# Altium PCB Arduino_FPGA_Shield.PcbDoc (part 1 of 2)
Units mm, origin at the board's own origin, x right, y up, seen from the top; angles counter-clockwise.
Board outline 68.58 x 53.34 mm, 4 copper layers (Top, PWR, GND, Bottom), stack 2.023 mm thick; 82 components, 141 nets, 474 pads, 191 vias.
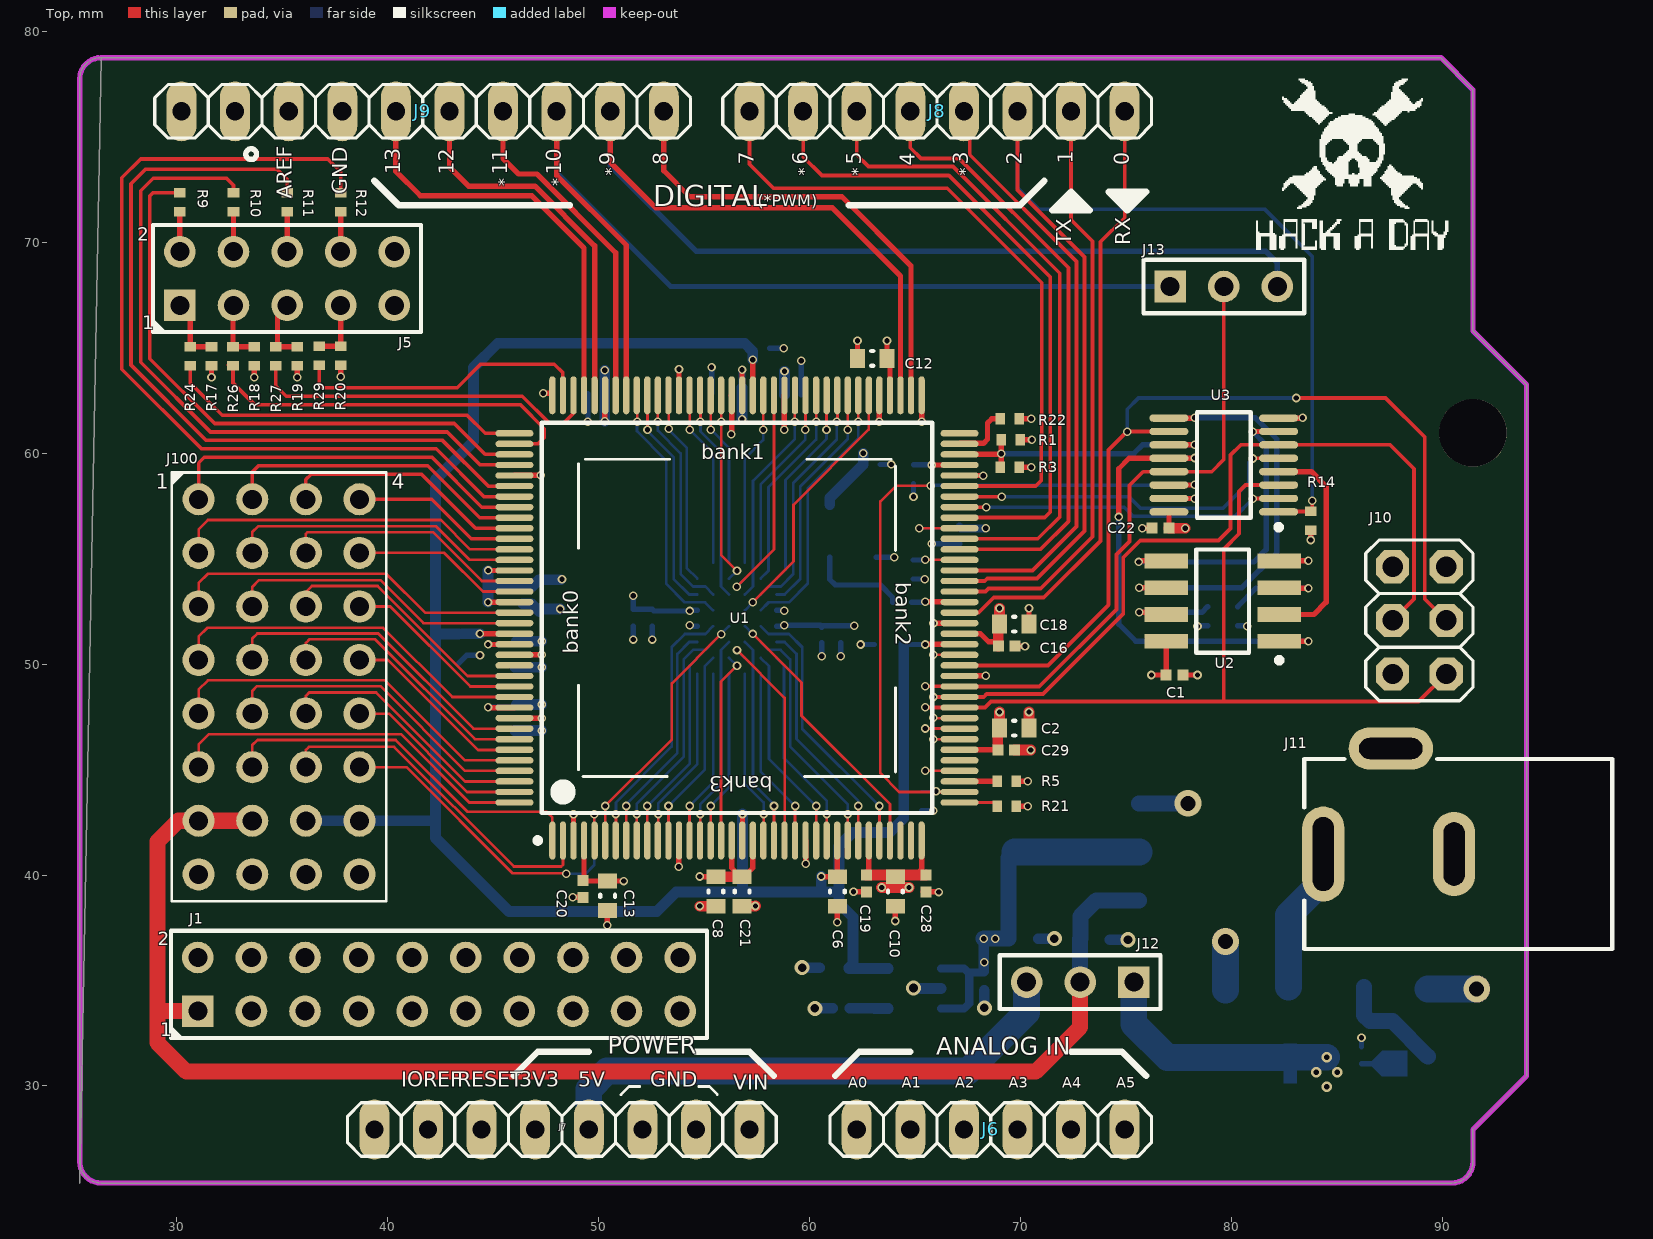
[diagram p0: Top view]
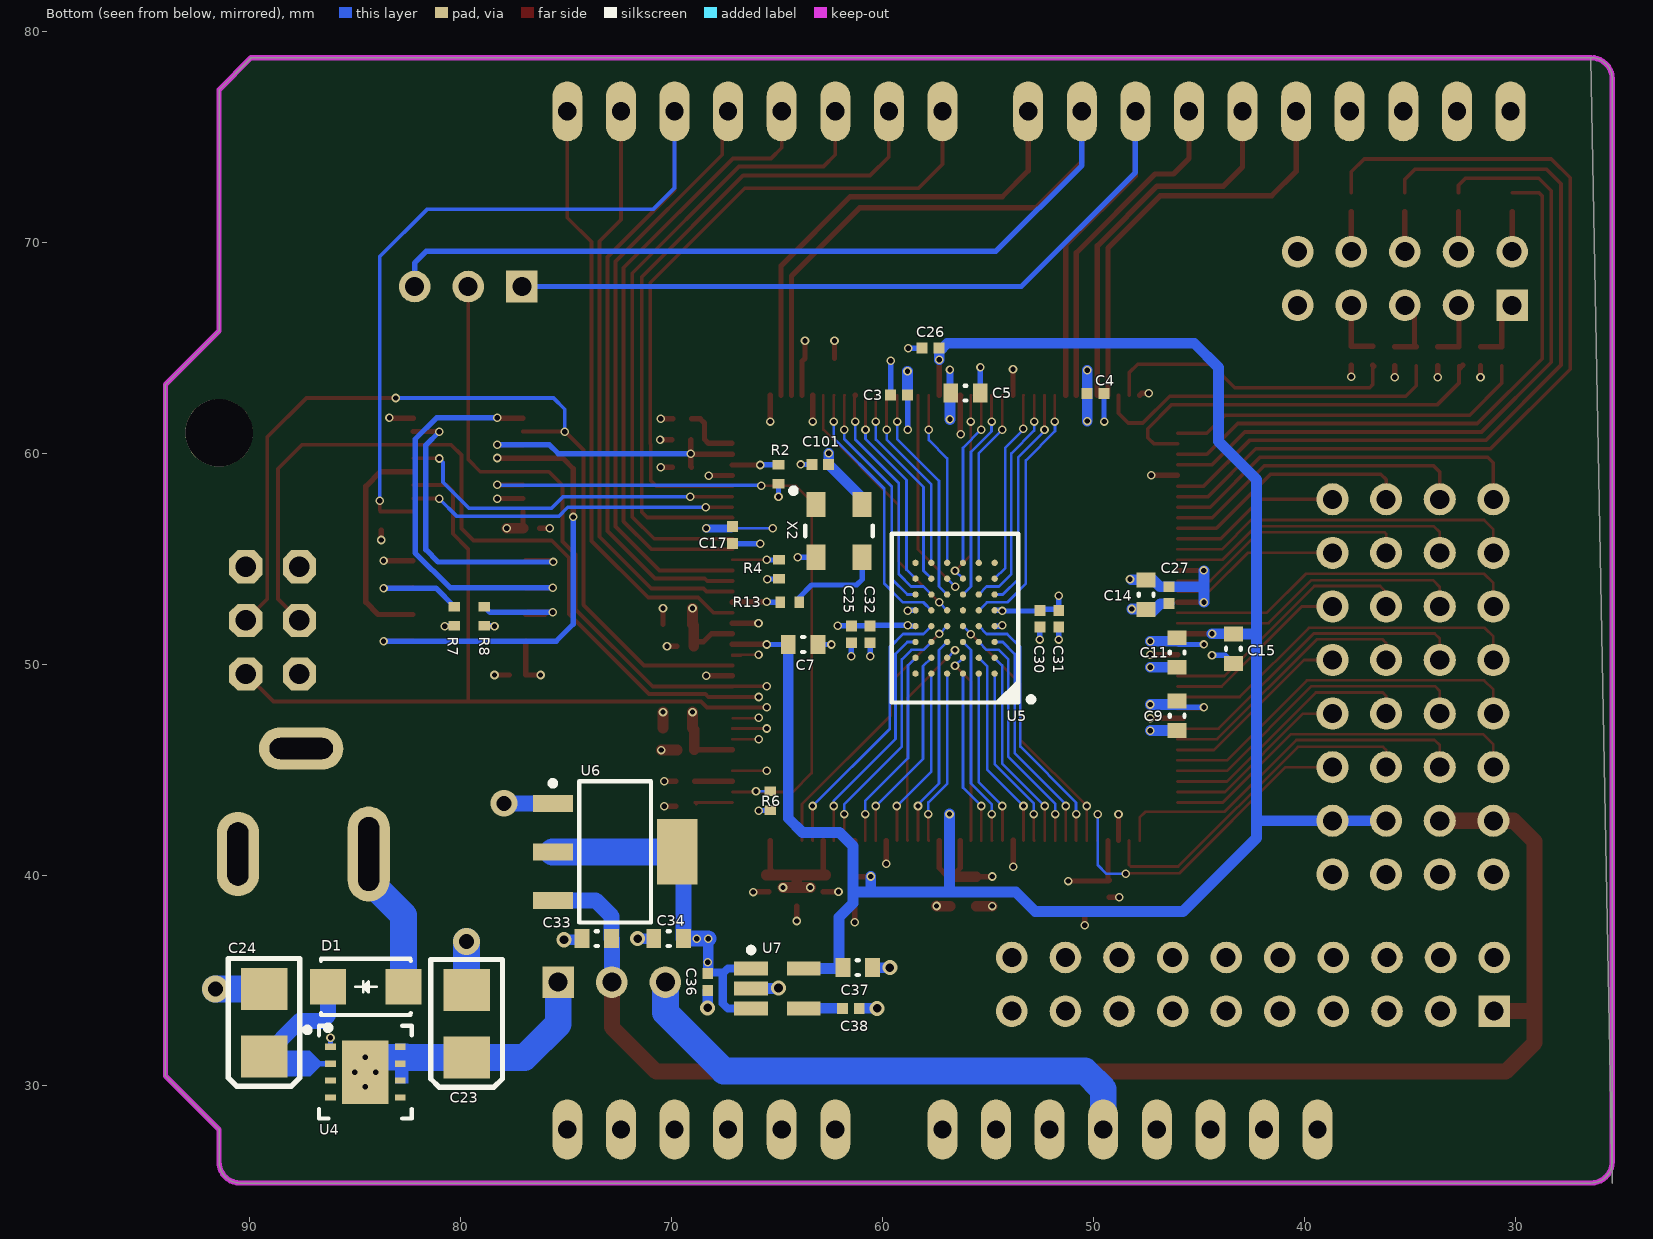
[diagram p1: Bottom view, seen from below]
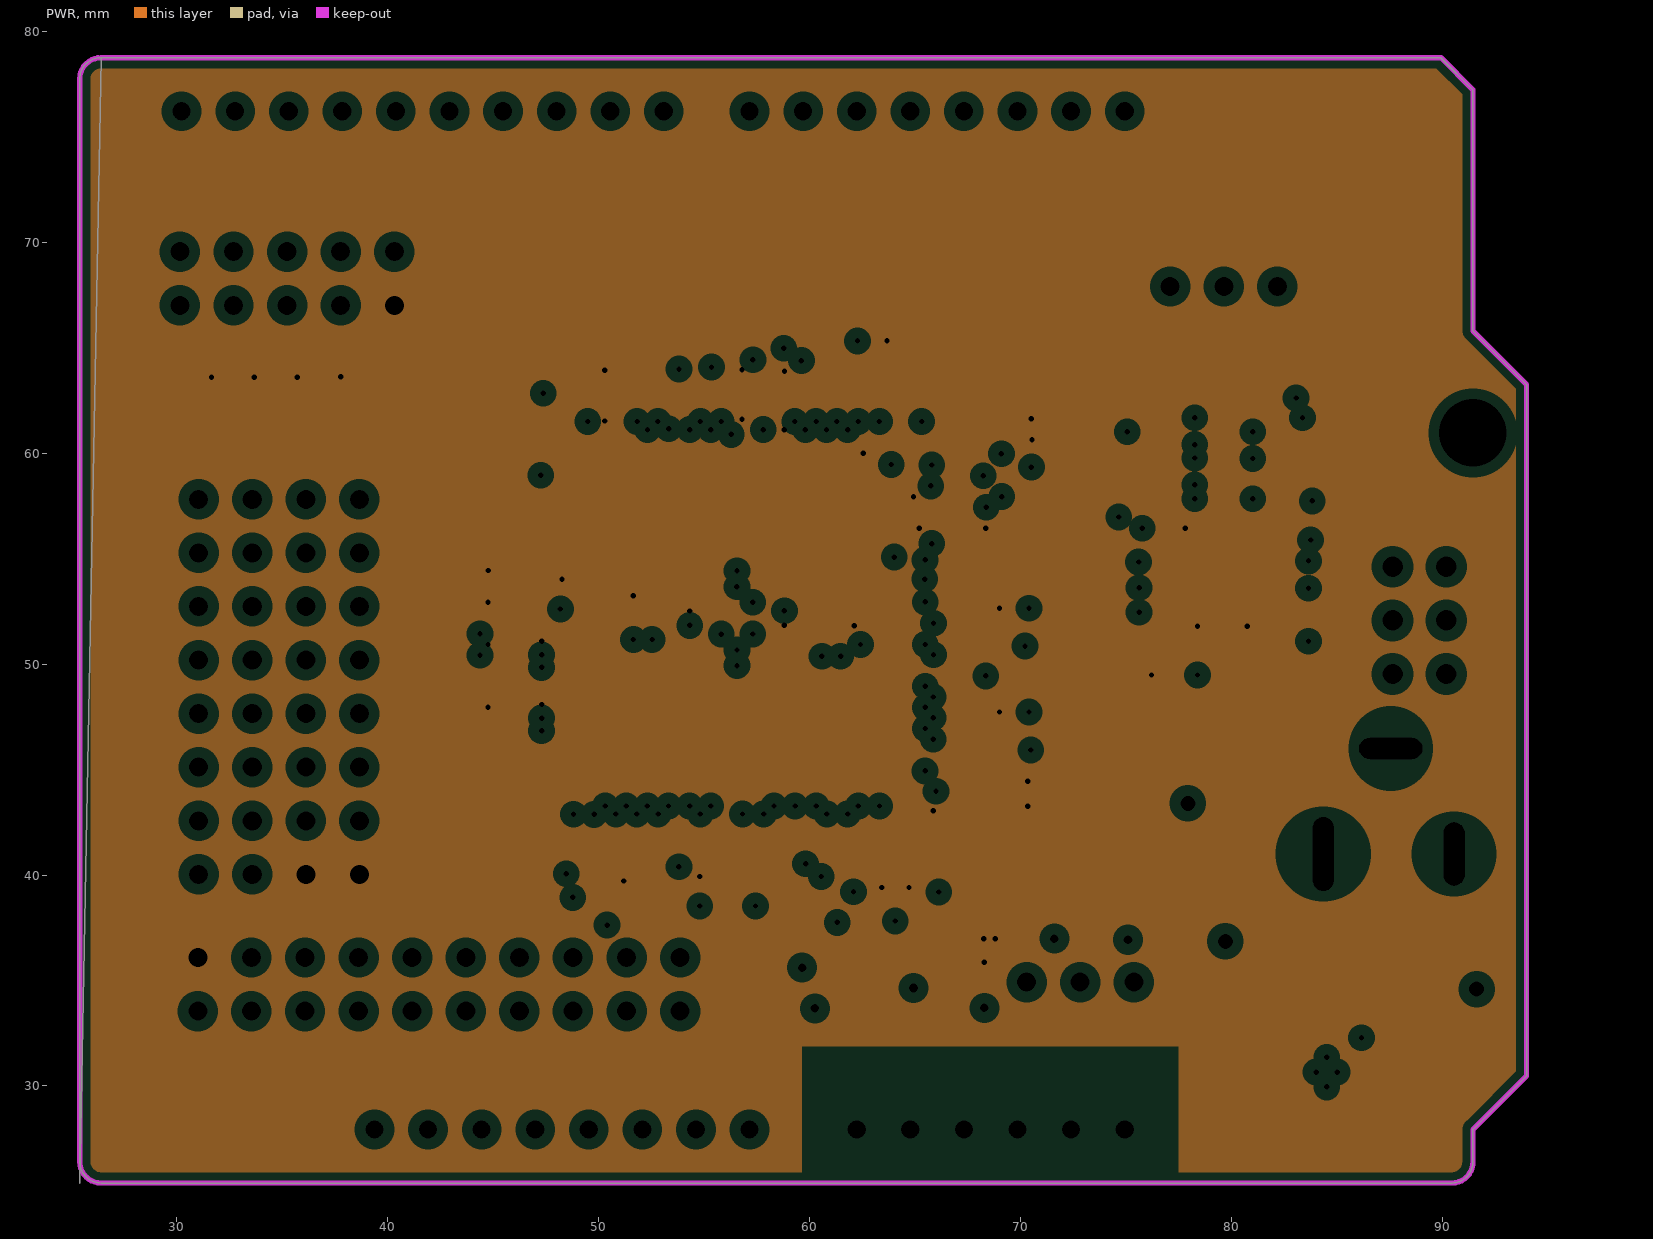
[diagram p2: PWR, clearances drawn from the general rule]
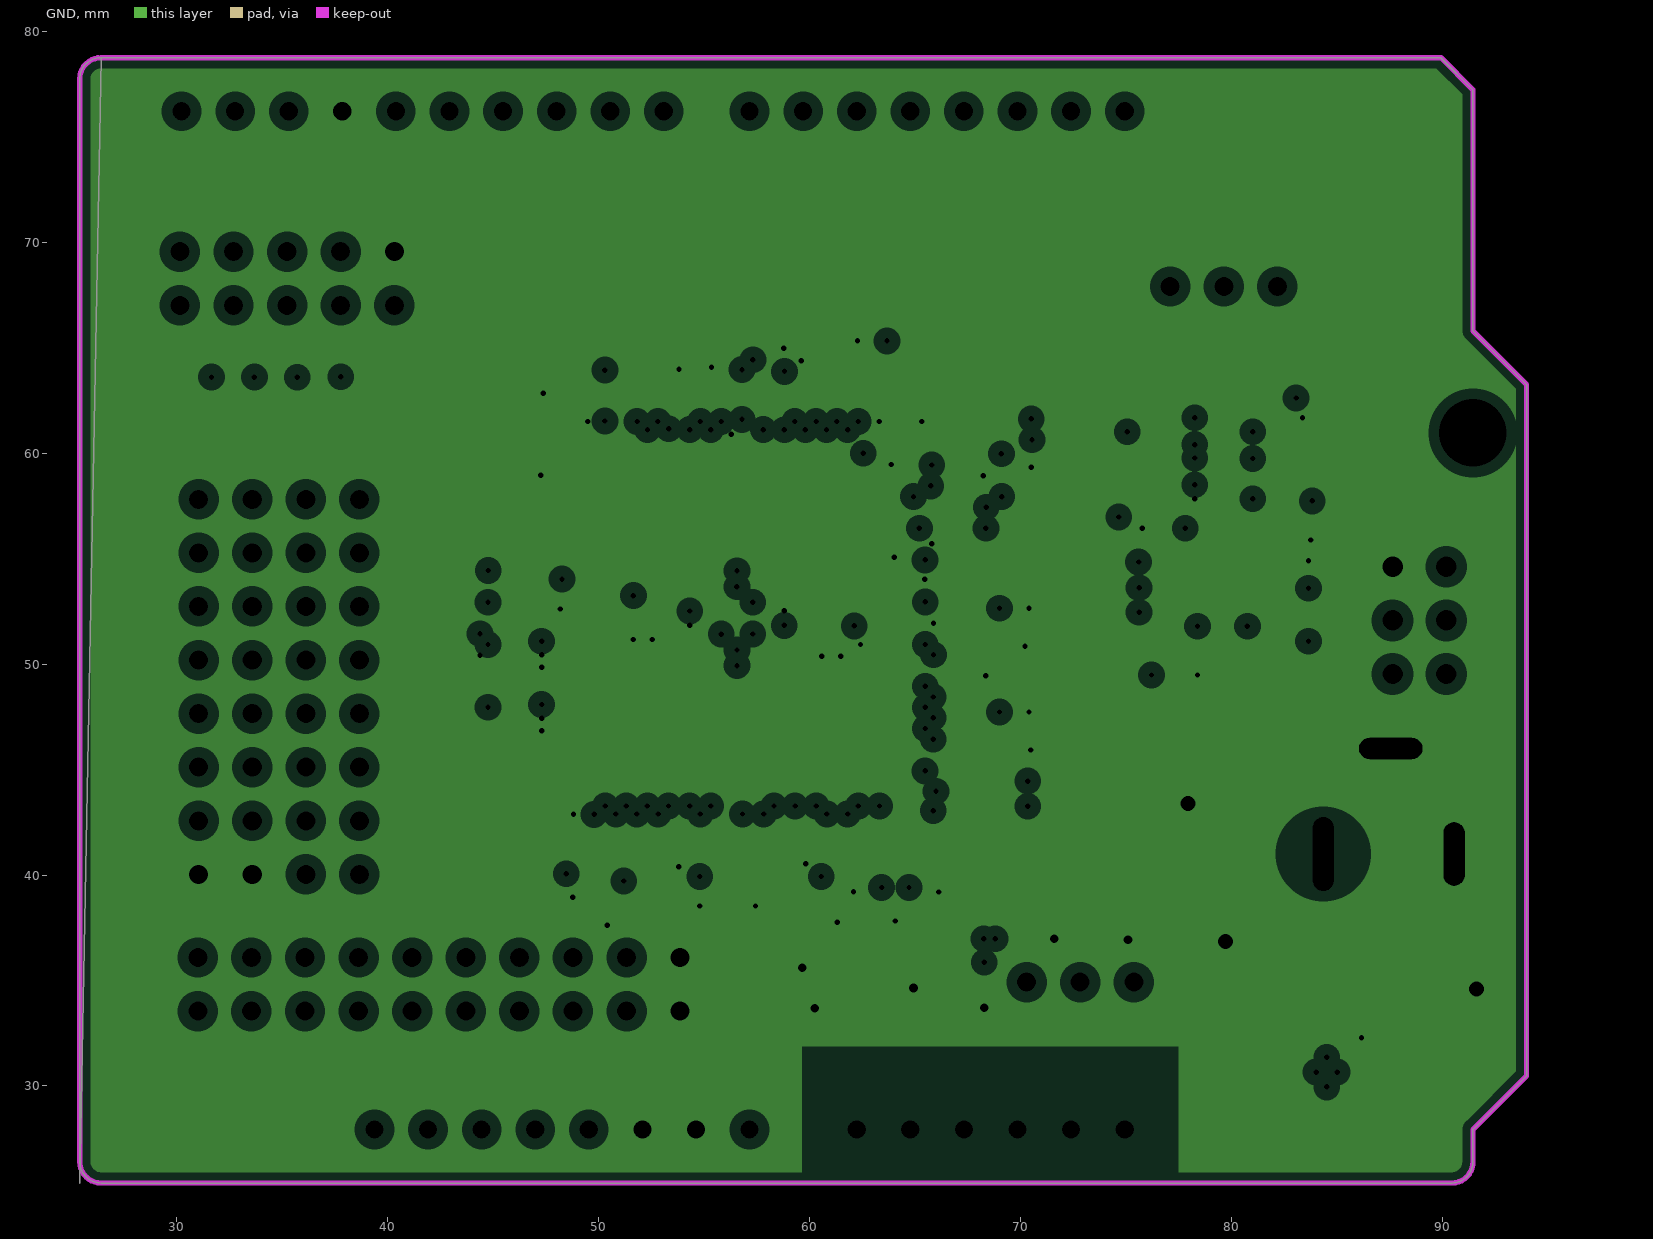
[diagram p3: GND, clearances drawn from the general rule]

## Layer stack, top to bottom
Top Solder: solder mask 0.0102, Solder Resist, Dk 3.5
Top: signal copper 0.035
Dielectric 1: core 1.5, FR-4, Dk 4.8
PWR: plane copper 0.036, net 3V3
Dielectric 4: prepreg 0.127, Dk 4.2
GND: plane copper 0.036, net GND
Dielectric 2: core 0.254, Dk 4.2
Bottom: signal copper 0.035
Bottom Solder: solder mask 0.0102, Solder Resist, Dk 3.5

## Board outline
26.416,78.74 89.916,78.74 91.44,77.216 91.44,65.786 93.98,63.246 93.98,30.48 91.44,27.94 91.44,26.416 cw(c90.437,26.403) 90.449,25.4 26.416,25.4 cw(c26.416,26.416) 25.4,26.416 25.4,77.749 cw(c26.403,77.737) 25.4,25.4

## Design rules (kind name [scope] priority, off if disabled: settings)
Clearance [All] p1: gap=0.137
HoleSize [All] p1: absolutevalues=TRUE maxlimit=2540 minlimit=0.178 maxpercent=80.000 minpercent=20.000
HoleToHoleClearance [All] p1: gap=0.203 allowstackedmicrovias=TRUE
MinimumSolderMaskSliver [All] p1 off: minsoldermaskwidth=0.254
PasteMaskExpansion [All] p1: expansion=0.051
PlaneClearance [All] p1: clearance=0.508
PlaneConnect PlaneConnect_1 [IsVia And (AsMM(ViaDiameter) = 0.405)] p1: planeconnectstyle=NoConnect reliefexpansion=0.508 reliefentries=4 reliefconductorwidth=0.254 reliefairgap=0.254
PlaneConnect [All] p2: planeconnectstyle=Relief reliefexpansion=0.508 reliefentries=4 reliefconductorwidth=0.254 reliefairgap=0.254
PolygonConnect ThermalVias [IsVia] p1: connectstyle=Direct reliefconductorwidth=0.254 reliefentries=4 polygonreliefangle="90 Angle" airgapwidth=0.254
PolygonConnect [All] p2: connectstyle=Relief reliefconductorwidth=0.254 reliefentries=4 polygonreliefangle="90 Angle" airgapwidth=0.254
RoutingVias [All] p1: holewidth=0.254 width=0.406 viastyle="Through Hole" minholewidth=0.254 minwidth=0.406 maxholewidth=0.711 maxwidth=1.219
SilkToBoardRegionClearance [All] p1 off:
SilkToSilkClearance [All] p1 off: silktosilkclearance=0.254
SilkToSolderMaskClearance [IsPad] p1 off: minsilkscreentomaskgap=0.254 clearancetoexposedcopper=TRUE
SolderMaskExpansion [All] p1: expansion=0.025
Width POWER [InNetClass('POWER')] p1: maxlimit=2.54 minlimit=0.254 preferedwidth=0.254
Width [All] p2: maxlimit=2.54 minlimit=0.127 preferedwidth=0.127
20 further rules are at their usual default settings.

## Classes and differential pairs
component class "Power - 3V3": C33 C34 U6
net class SRAM0_D[15..0]: SRAM0_D0 SRAM0_D1 SRAM0_D2 SRAM0_D3 SRAM0_D4 SRAM0_D5 SRAM0_D6 SRAM0_D7 SRAM0_D8 SRAM0_D9 SRAM0_D10 SRAM0_D11 SRAM0_D12 SRAM0_D13 SRAM0_D14 SRAM0_D15
net class SRAM0_A[17..0]: SRAM0_A0 SRAM0_A1 SRAM0_A2 SRAM0_A3 SRAM0_A4 SRAM0_A5 SRAM0_A6 SRAM0_A7 SRAM0_A8 SRAM0_A9 SRAM0_A10 SRAM0_A11 SRAM0_A12 SRAM0_A13 SRAM0_A14 SRAM0_A15 SRAM0_A16 SRAM0_A17
component class SRAM0: C25 C30 C31 C32 U5
component class "SPI MUX": C22 U3
component class FLASH_MEMORY: C1 R7 R8 U2
component class POWER: C23 C24 D1 J11 J12 U4
component class "Arduino FPGA Top-Level Interface": J1 J5 J6 J7 J8 J9 J10 J13 J100
component class "U_FPGA - Decoupling": C2 C3 C4 C5 C6 C7 C8 C9 C10 C11 C12 C13 C14 C15 C16 C17 C18 C19 C20 C21 C26 C27 C28 C29
component class FPGA_SUBSYSTEM: R1 R2 R3 R4 R5 R6 R9 R10 R11 R12 R17 R18 R19 R20 R21 R22 R24 R26 R27 R29 U1
component class "ARDUINO FPGA DESIGN": C101 R13 R14 X2
component class "Power - 1V2": C36 C37 C38 U7

## Components (designator, comment, footprint, x,y, rotation, side; value= is the part's Value field where it differs from the comment)
C1 "CAP 100nF 16V 0402(1005)" CAPC0402(1005)60_L 77.292,49.479 r0 top
C2 "CAP 4.7uF 10V 0603(1608)" CAPC0603(1608)55_L 69.698,46.965 r0 top
C3 "CAP 470nF 10V 0402(1005)" CAPC0402(1005)60_L 59.207,62.763 r180 bottom
C4 "CAP 470nF 10V 0402(1005)" CAPC0402(1005)60_L 49.892,62.823 r0 bottom
C5 "CAP 4.7uF 10V 0603(1608)" CAPC0603(1608)55_L 56.058,62.84 r180 bottom
C6 "CAP 4.7uF 10V 0603(1608)" CAPC0603(1608)55_L 61.316,39.218 r270 top
C7 "CAP 4.7uF 10V 0603(1608)" CAPC0603(1608)55_L 63.754,50.927 r180 bottom
C8 "CAP 4.7uF 10V 0603(1608)" CAPC0603(1608)55_L 55.55,39.218 r270 top
C9 "CAP 4.7uF 10V 0603(1608)" CAPC0603(1608)55_L 46.025,47.549 r270 bottom
C10 "CAP 4.7uF 10V 0603(1608)" CAPC0603(1608)55_L 64.059,39.218 r270 top
C11 "CAP 4.7uF 10V 0603(1608)" CAPC0603(1608)55_L 46.025,50.546 r270 bottom
C12 "CAP 4.7uF 10V 0603(1608)" CAPC0603(1608)55_L 62.967,64.491 r180 top
C13 "CAP 4.7uF 10V 0603(1608)" CAPC0603(1608)55_L 50.419,39.014 r270 top
C14 "CAP 4.7uF 10V 0603(1608)" CAPC0603(1608)55_L 47.498,53.289 r90 bottom
C15 "CAP 4.7uF 10V 0603(1608)" CAPC0603(1608)55_L 43.358,50.724 r270 bottom
C16 "CAP 470nF 10V 0402(1005)" CAPC0402(1005)60_L 69.342,50.851 r180 top
C17 "CAP 470nF 10V 0402(1005)" CAPC0402(1005)60_L 67.107,56.109 r90 bottom
C18 "CAP 4.7uF 10V 0603(1608)" CAPC0603(1608)55_L 69.698,51.892 r180 top
C19 "CAP 470nF 10V 0402(1005)" CAPC0402(1005)60_L 62.687,39.599 r90 top
C20 "CAP 470nF 10V 0402(1005)" CAPC0402(1005)60_L 49.251,39.345 r90 top
C21 "CAP 4.7uF 10V 0603(1608)" CAPC0603(1608)55_L 56.794,39.218 r90 top
C22 "CAP 100nF 16V 0402(1005)" CAPC0402(1005)60_L 76.632,56.439 r180 top
C23 "TAJB106K020R" AVX-CAPC3528_V 79.705,32.944 r90 bottom
C24 "TAJB106K020R" AVX-CAPC3528_V 89.306,32.995 r90 bottom
C25 "CAP 100nF 16V 0402(1005)" CAPC0402(1005)60_L 61.468,51.41 r270 bottom
C26 "CAP 470nF 10V 0402(1005)" CAPC0402(1005)60_L 57.709,64.973 r0 bottom
C27 "CAP 470nF 10V 0402(1005)" CAPC0402(1005)60_L 46.406,53.264 r270 bottom
C28 "CAP 470nF 10V 0402(1005)" CAPC0402(1005)60_L 65.507,39.599 r90 top
C29 "CAP 470nF 10V 0402(1005)" CAPC0402(1005)60_L 69.317,45.923 r180 top
C30 "CAP 100nF 16V 0402(1005)" CAPC0402(1005)60_L 52.527,52.146 r270 bottom
C31 "CAP 10nF 16V 0402(1005)" CAPC0402(1005)33_L 51.638,52.146 r270 bottom
C32 "CAP 10nF 16V 0402(1005)" CAPC0402(1005)33_L 60.579,51.41 r270 bottom
C33 "CAP 4.7uF 10V 0603(1608)" CAPC0603(1608)55_L 73.533,36.982 r0 bottom
C34 "CAP 4.7uF 10V 0603(1608)" CAPC0603(1608)55_L 70.129,36.982 r0 bottom
C36 "CAP 1uF 16V 0402(1005)" CAPC0402(1005)60_L 68.275,34.925 r90 bottom
C37 "CAP 2.2uF 16V 0603(1608)" CAPC0603(1608)55_L 61.163,35.611 r0 bottom
C38 "CAP 10nF 16V 0402(1005)" CAPC0402(1005)33_L 61.493,33.68 r0 bottom
C101 "CAP 100nF 16V 0402(1005)" CAPC0402(1005)60_L 62.941,59.461 r0 bottom
D1 "S1G" DO-214AC 84.48,34.696 r0 bottom
J1 "Header 10X2" HEADER_10X2 31,33.5 r0 top
J5 "Header 5X2" HDR2X5 30.15,67.005 r0 top
J6 "Header 6" 1X06 68.58,27.94 r0 top
J7 "Header 8" 1X08 48.26,27.94 r0 top
J8 "Header 8" 1X08 66.04,76.2 r180 top
J9 "Header 10" 1X10@1 41.656,76.2 r180 top
J10 "Header 3X2" 2X03 88.9,52.07 r90 top
J11 "PWR CONNECTOR" KLD-0202 98.044,40.996 r180 top
J12 "3-WAY JUMPER" HDR1X3 75.362,34.925 r180 top
J13 "3-WAY JUMPER" HDR1X3 77.089,67.894 r0 top
J100 "ARR_32P" ARR_100X100X32P 31.039,57.81 r0 top
R1 "100R 1 0402" RESC0402(1005)40_L 69.52,60.63 r0 top
R2 "4K7 1 0402" RESC0402(1005)40_L 64.922,59.004 r270 bottom
R3 "100R 1 0402" RESC0402(1005)40_L 69.494,59.334 r180 top
R4 "1K 1 0402" RESC0402(1005)40_L 64.897,54.483 r90 bottom
R5 "4K7 1 0402" RESC0402(1005)40_L 69.342,44.45 r0 top
R6 "4K7 1 0402" RESC0402(1005)40_L 65.303,43.51 r270 bottom
R7 "4K7" RESC0402(1005)40_L 80.289,52.273 r270 bottom
R8 "4K7" RESC0402(1005)40_L 78.867,52.273 r270 bottom
R9 "33R 1 0402" RESC0402(1005)40_L 30.15,71.882 r90 top
R10 "33R 1 0402" RESC0402(1005)40_L 32.69,71.882 r90 top
R11 "33R 1 0402" RESC0402(1005)40_L 35.23,71.882 r90 top
R12 "33R 1 0402" RESC0402(1005)40_L 37.77,71.882 r90 top
R13 "33R 1 0402" RESC0402(1005)40_L 64.389,52.934 r180 bottom
R14 "4K7 1 0402" RESC0402(1005)40_L 83.744,56.794 r90 top
R17 "4K7 1 0402" RESC0402(1005)40_L 31.648,64.592 r270 top
R18 "4K7 1 0402" RESC0402(1005)40_L 33.68,64.592 r270 top
R19 "4K7 1 0402" RESC0402(1005)40_L 35.712,64.585 r270 top
R20 "4K7 1 0402" RESC0402(1005)40_L 37.77,64.61 r270 top
R21 "4K7 1 0402" RESC0402(1005)40_L 69.342,43.256 r0 top
R22 "330R 1 0402" RESC0402(1005)40_L 69.487,61.62 r0 top
R24 "33R 1 0402" RESC0402(1005)40_L 30.632,64.592 r270 top
R26 "33R 1 0402" RESC0402(1005)40_L 32.664,64.592 r270 top
R27 "33R 1 0402" RESC0402(1005)40_L 34.696,64.585 r270 top
R29 "33R 1 0402" RESC0402(1005)40_L 36.754,64.61 r270 top
U1 "XC6SLX9-2TQG144C" TQG144_N 56.555,52.187 r90 top
U2 "S25FL216K0PMFI041" SPANSION-SOIC127P600X175-8M 79.578,52.984 r180 top
U3 "SN74CBTLV3257DBQR" TI-DBQ16_N 79.629,59.436 r180 top
U4 "LM1086ILD-3.3/NOPB" LDC08A 84.506,30.658 r180 bottom
U5 "IS61WV12816DBLL-10BLI" ISSI-TF-BGA-48-6000X8000DE 56.552,52.172 r0 bottom
U6 "AP2114H-3.3TRG1" SOT230P700X180-4L 72.669,41.097 r180 bottom
U7 "CAT6219-125TDGT3" ONSC-SOT23-5_M 64.973,34.62 r180 bottom
X2 "KC5032A20.0000CM0E00" HOSC-L500HW320H105-4_2 62.052,56.312 r270 bottom

## Footprints (in the part's own frame and the unit in brackets; to place one, negate y for a bottom-side part, rotate by r counter-clockwise, add the part's x,y. Pads: shape width x height; smd on the part's side, far side on the other; paste and mask are expansions set on the pad)
1X06 [mil] "1X06"
  oval 56x112 hole 34: 1(-250,0) 2(-150,0) 3(-50,0) 4(50,0) 5(150,0) 6(250,0)
  silkscreen extent -300,-50 300,50
1X08 [mil] "1X08"
  oval 56x112 hole 34: 1(-350,0) 2(-250,0) 3(-150,0) 4(-50,0) 5(50,0) 6(150,0) 7(250,0) 8(350,0)
  silkscreen extent -400,-50 400,50
1X10@1 [mil] "1X10@1"
  oval 56x112 hole 34: 1(-450,0) 2(-350,0) 3(-250,0) 4(-150,0) 5(-50,0) 6(50,0) 7(150,0) 8(250,0) 9(350,0) 10(450,0)
  silkscreen extent -500,-50 500,50
2X03 [mil] "2X03"
  oct 62x62 hole 38: 1(-100,-50) 2(-100,50) 3(0,-50) 4(0,50) 5(100,-50) 6(100,50)
  silkscreen extent -150,-100 150,100
ARR_100X100X32P [mil] "100X100mil 32 PIN ARRAY OF PADS"
  round 60 hole 35.5: 1(0,0) 2(100,0) 3(200,0) 4(300,0) 5(0,-100) 6(100,-100) 7(200,-100) 8(300,-100) 9(0,-200) 10(100,-200) 11(200,-200) 12(300,-200) 13(0,-300) 14(100,-300) 15(200,-300) 16(300,-300) 17(0,-400) 18(100,-400) 19(200,-400) 20(300,-400) 21(0,-500) 22(100,-500) 23(200,-500) 24(300,-500) 25(0,-600) 26(100,-600) 27(200,-600) 28(300,-600) 29(0,-700) 30(100,-700) 31(200,-700) 32(300,-700)
  silkscreen extent -50,-750 350,50
AVX-CAPC3528_V [mm] "SMT Capacitor, 2 Leads, Body 3.5x2.8mm"
  rect 2x2.2 smd: 1(-1.6,0) 2(1.6,0)
  silkscreen extent -3,-1.7 3.05,1.7, body extent -1.79,-1.54 1.8,1.54, height 1.9
CAPC0402(1005)33_L [mm] "Chip Capacitor, Body 1.0x0.5mm, Height 0.33mm, IPC High Density"
  rect 0.52x0.52 smd: 1(-0.4,0) 2(0.4,0)
  body extent -0.55,-0.3 0.55,0.3, height 0.33
CAPC0402(1005)60_L [mm] "Chip Capacitor, Body 1.0x0.5mm, Height 0.6mm, IPC High Density"
  rect 0.52x0.52 smd: 1(-0.4,0) 2(0.4,0)
  body extent -0.55,-0.3 0.55,0.3, height 0.6
CAPC0603(1608)55_L [mm] "Chip Capacitor, Body 1.6x0.8mm, Height 0.55mm, IPC High Density"
  rect 0.7x0.9 smd: 1(-0.7,0) 2(0.7,0)
  silkscreen extent -0.05,-0.35 0.05,0.35, body extent -0.87,-0.47 0.88,0.48, height 0.55
DO-214AC [mm] "SMA, 2-Leads, Body 4.245x2.665mm, Height 2.29mm"
  rect 1.7x1.68 smd: 1(-1.79,0) 2(1.79,0)
  silkscreen extent -2.12,-1.33 2.12,2.06, body extent -2.57,-1.33 2.57,1.33, height 2.29
HDR1X3 [mm] "Connector; Header; 3 Position"
  rect 1.5x1.5 hole 0.9: 1(0,0)
  round 1.5 hole 0.9: 2(2.54,0) 3(5.08,0)
  silkscreen extent -1.27,-1.27 6.35,1.27
HDR2X5 [mm] "Connector; Header; 5x2 Position"
  rect 1.5x1.5 hole 0.9: 1(0,0)
  round 1.5 hole 0.9: 2(0,2.54) 3(2.54,0) 4(2.54,2.54) 5(5.08,0) 6(5.08,2.54) 7(7.62,0) 8(7.62,2.54) 9(10.16,0) 10(10.16,2.54)
  silkscreen extent -1.27,-1.27 11.43,3.81
HEADER_10X2 [mm]
  rect 1.5x1.5 hole 0.9: 1(0,0.051)
  round 1.5 hole 0.9: 2(0,2.591) 3(2.54,0.051) 4(2.54,2.591) 5(5.08,0.051) 6(5.08,2.591) 7(7.62,0.051) 8(7.62,2.591) 9(10.16,0.051) 10(10.16,2.591) 11(12.7,0.051) 12(12.7,2.591) 13(15.24,0.051) 14(15.24,2.591) 15(17.78,0.051) 16(17.78,2.591) 17(20.32,0.051) 18(20.32,2.591) 19(22.86,0.051) 20(22.86,2.591)
  silkscreen extent -1.27,-1.22 24.13,3.86
HOSC-L500HW320H105-4_2 [mm] "Quartz Crystal, Body 5.0 x 3.2 mm, Height 1.05mm"
  rect 1.2x0.9 smd: 1(-1.25,-1.1) 2(1.25,-1.1) 3(1.25,1.1) 4(-1.25,1.1)
  silkscreen extent -2.03,-2.28 0.25,1.6, body extent -2.5,-1.6 2.5,1.6, height 1.05
ISSI-TF-BGA-48-6000X8000DE [mm] "BGA, 48-Balls, Body 8x6mm, Pitch 0.75mm"
  round 0.3 smd: A1(-1.875,2.625) A2(-1.125,2.625) A3(-0.375,2.625) A4(0.375,2.625) A5(1.125,2.625) A6(1.875,2.625) B1(-1.875,1.875) B2(-1.125,1.875) B3(-0.375,1.875) B4(0.375,1.875) B5(1.125,1.875) B6(1.875,1.875) C1(-1.875,1.125) C2(-1.125,1.125) C3(-0.375,1.125) C4(0.375,1.125) C5(1.125,1.125) C6(1.875,1.125) D1(-1.875,0.375) D2(-1.125,0.375) D3(-0.375,0.375) D4(0.375,0.375) D5(1.125,0.375) D6(1.875,0.375) E1(-1.875,-0.375) E2(-1.125,-0.375) E3(-0.375,-0.375) E4(0.375,-0.375) E5(1.125,-0.375) E6(1.875,-0.375) F1(-1.875,-1.125) F2(-1.125,-1.125) F3(-0.375,-1.125) F4(0.375,-1.125) F5(1.125,-1.125) F6(1.875,-1.125) G1(-1.875,-1.875) G2(-1.125,-1.875) G3(-0.375,-1.875) G4(0.375,-1.875) G5(1.125,-1.875) G6(1.875,-1.875) H1(-1.875,-2.625) H2(-1.125,-2.625) H3(-0.375,-2.625) H4(0.375,-2.625) H5(1.125,-2.625) H6(1.875,-2.625)
  silkscreen extent -3.72,-4 3,4, body extent -3,-4 3,4, height 1.2
KLD-0202 [mm] "DC Power Jack, 2.5mm, KLD Series, PCB Mount"
  oval 2x4.5 hole 1 slot 3.5 at 90 deg: 1(13.7,0)
  oval 2x4 hole 1 slot 3 at 90 deg: 2(7.5,0)
  oval 4x2 hole 1 slot 3 at 0 deg: 3(10.5,-5)
  silkscreen extent 0,-4.5 14.6,4.5
LDC08A [mm] "PSON, 8-Leads, Body 4x4mm, Pitch 0.8mm, NSC Recommended"
  rect 0.5x0.3 smd paste-0.15 mask+0.051: 1(-1.65,1.2) 2(-1.65,0.4) 3(-1.65,-0.4) 4(-1.65,-1.2) 5(1.65,-1.2) 6(1.65,-0.4) 7(1.65,0.4) 8(1.65,1.2)
  rect 2.2x3 smd paste-1.5 mask+0.051: 9(0,0)
  silkscreen extent -2.88,-2.2 2.2,2.2, body extent -2.05,-2.05 2.05,2.05, height 0.8
ONSC-SOT23-5_M [mm] "SOT23, 5-Leads, Body 2.90x1.6mm, Pitch 0.95mm, IPC Low Density"
  rect 1.6x0.65 smd: 1(-1.25,0.95) 2(-1.25,0) 3(-1.25,-0.95) 4(1.25,-0.95) 5(1.25,0.95)
  silkscreen extent -1.38,1.7 -1.13,1.95, body extent -0.8,-1.45 0.8,1.45, height 1
RESC0402(1005)40_L [mm] "Chip Resistor, Body 1.0x0.5mm, IPC High Density"
  rect 0.45x0.55 smd: 1(-0.45,0) 2(0.45,0)
  body extent -0.52,-0.27 0.53,0.28, height 0.4
SOT230P700X180-4L [mm] "SOT223, 4-Leads, Body 6.50x7.00mm (avg), Pitch 2.30mm, IPC High Density"
  rect 1.9x0.8 smd: 1(-2.95,2.3) 2(-2.95,0) 3(-2.95,-2.3)
  rect 1.9x3.1 smd: 4(2.95,0)
  silkscreen extent -3.08,-3.35 1.7,3.37, body extent -1.85,-3.35 1.85,3.35, height 1.8
SPANSION-SOIC127P600X175-8M [mm] "SOIC, 8-Leads, Body 4.90x3.95mm, Pitch 1.27mm, IPC Low Density"
  rect 2.05x0.7 smd: 1(-2.675,1.905) 2(-2.675,0.635) 3(-2.675,-0.635) 4(-2.675,-1.905) 5(2.675,-1.905) 6(2.675,-0.635) 7(2.675,0.635) 8(2.675,1.905)
  silkscreen extent -2.8,-2.45 1.25,2.93, body extent -2,-2.45 2,2.45, height 1.75
TI-DBQ16_N [mm] "SOP, 16-Leads, Body 4.9x3.9mm, Pitch 0.635mm, IPC Medium Density"
  oval 1.85x0.35 smd: 1(-2.6,2.222) 2(-2.6,1.587) 3(-2.6,0.952) 4(-2.6,0.317) 5(-2.6,-0.318) 6(-2.6,-0.953) 7(-2.6,-1.588) 8(-2.6,-2.223) 9(2.6,-2.222) 10(2.6,-1.587) 11(2.6,-0.952) 12(2.6,-0.317) 13(2.6,0.318) 14(2.6,0.953) 15(2.6,1.588) 16(2.6,2.223)
  silkscreen extent -2.73,-2.5 1.28,3.07, body extent -2,-2.5 2,2.5, height 1.75
TQG144_N [mm] "Thin QFP, 144-Leads, Body 20x20mm, Pitch 0.5mm, IPC Medium Density"
  oval 1.8x0.3 smd: 1(-10.55,8.75) 2(-10.55,8.25) 3(-10.55,7.75) 4(-10.55,7.25) 5(-10.55,6.75) 6(-10.55,6.25) 7(-10.55,5.75) 8(-10.55,5.25) 9(-10.55,4.75) 10(-10.55,4.25) 11(-10.55,3.75) 12(-10.55,3.25) 13(-10.55,2.75) 14(-10.55,2.25) 15(-10.55,1.75) 16(-10.55,1.25) 17(-10.55,0.75) 18(-10.55,0.25) 19(-10.55,-0.25) 20(-10.55,-0.75) 21(-10.55,-1.25) 22(-10.55,-1.75) 23(-10.55,-2.25) 24(-10.55,-2.75) 25(-10.55,-3.25) 26(-10.55,-3.75) 27(-10.55,-4.25) 28(-10.55,-4.75) 29(-10.55,-5.25) 30(-10.55,-5.75) 31(-10.55,-6.25) 32(-10.55,-6.75) 33(-10.55,-7.25) 34(-10.55,-7.75) 35(-10.55,-8.25) 36(-10.55,-8.75) 73(10.55,-8.75) 74(10.55,-8.25) 75(10.55,-7.75) 76(10.55,-7.25) 77(10.55,-6.75) 78(10.55,-6.25) 79(10.55,-5.75) 80(10.55,-5.25) 81(10.55,-4.75) 82(10.55,-4.25) 83(10.55,-3.75) 84(10.55,-3.25) 85(10.55,-2.75) 86(10.55,-2.25) 87(10.55,-1.75) 88(10.55,-1.25) 89(10.55,-0.75) 90(10.55,-0.25) 91(10.55,0.25) 92(10.55,0.75) 93(10.55,1.25) 94(10.55,1.75) 95(10.55,2.25) 96(10.55,2.75) 97(10.55,3.25) 98(10.55,3.75) 99(10.55,4.25) 100(10.55,4.75) 101(10.55,5.25) 102(10.55,5.75) 103(10.55,6.25) 104(10.55,6.75) 105(10.55,7.25) 106(10.55,7.75) 107(10.55,8.25) 108(10.55,8.75)
  oval 0.3x1.8 smd: 37(-8.75,-10.55) 38(-8.25,-10.55) 39(-7.75,-10.55) 40(-7.25,-10.55) 41(-6.75,-10.55) 42(-6.25,-10.55) 43(-5.75,-10.55) 44(-5.25,-10.55) 45(-4.75,-10.55) 46(-4.25,-10.55) 47(-3.75,-10.55) 48(-3.25,-10.55) 49(-2.75,-10.55) 50(-2.25,-10.55) 51(-1.75,-10.55) 52(-1.25,-10.55) 53(-0.75,-10.55) 54(-0.25,-10.55) 55(0.25,-10.55) 56(0.75,-10.55) 57(1.25,-10.55) 58(1.75,-10.55) 59(2.25,-10.55) 60(2.75,-10.55) 61(3.25,-10.55) 62(3.75,-10.55) 63(4.25,-10.55) 64(4.75,-10.55) 65(5.25,-10.55) 66(5.75,-10.55) 67(6.25,-10.55) 68(6.75,-10.55) 69(7.25,-10.55) 70(7.75,-10.55) 71(8.25,-10.55) 72(8.75,-10.55) 109(8.75,10.55) 110(8.25,10.55) 111(7.75,10.55) 112(7.25,10.55) 113(6.75,10.55) 114(6.25,10.55) 115(5.75,10.55) 116(5.25,10.55) 117(4.75,10.55) 118(4.25,10.55) 119(3.75,10.55) 120(3.25,10.55) 121(2.75,10.55) 122(2.25,10.55) 123(1.75,10.55) 124(1.25,10.55) 125(0.75,10.55) 126(0.25,10.55) 127(-0.25,10.55) 128(-0.75,10.55) 129(-1.25,10.55) 130(-1.75,10.55) 131(-2.25,10.55) 132(-2.75,10.55) 133(-3.25,10.55) 134(-3.75,10.55) 135(-4.25,10.55) 136(-4.75,10.55) 137(-5.25,10.55) 138(-5.75,10.55) 139(-6.25,10.55) 140(-6.75,10.55) 141(-7.25,10.55) 142(-7.75,10.55) 143(-8.25,10.55) 144(-8.75,10.55)
  silkscreen extent -10.67,-9.25 9.25,9.57, body extent -10,-10 10,10, height 1.6

## Part data
C1 C22 C25 C30 C101: library part "CAP 100nF 16V ±10% 0402 (1005 Metric) Thickness 0.6mm SMD"
C2 C5 C6 C7 C8 C9 C10 C11 C12 C13 C14 C15 C18 C21 C33 C34: library part "CAP 4.7uF 10V ±10% 0603 (1608 Metric) Thickness 0.55mm SMD"
C3 C4 C16 C17 C19 C20 C26 C27 C28 C29: library part "CAP 470nF 10V ±10% 0402 (1005 Metric) Thickness 0.6mm SMD"
C23 C24: library part CMP-0279-00001-1, "Capacitor, Tantalum, 10uF 10% 20V MCCT-B (3528)"
C31 C32 C38: library part CMP-1034-01875-1, "CAP 10nF 16V ±10% 0402 (1005 Metric) Thickness 0.33mm SMD"
C36: library part CMP-1034-02119-1, "CAP 1uF 16V ±10% 0402 (1005 Metric) Thickness 0.6mm SMD"
C37: library part CMP-1035-02762-1, "CAP 2.2uF 16V ±10% 0603 (1608 Metric) Thickness 0.55mm SMD"
D1: "Fairchild S1G General Purpose Rectifier"
J1: "Header, 10-Pin, Dual row"
J5: "Header, 5-Pin, Dual row"
J6: "Header, 6-Pin"
J7 J8: "Header, 8-Pin"
J9: "Header, 10-Pin"
J10: "Header, 3-Pin, Dual row"
J11: library part POWER-CONNECTOR-3, "Connector, 3 Conductor Power Jack"
J12 J13: "3-Way Jumper - Center Output"
J100: "Pad Array - 32 Pins 100X100mil spacing"
R1 R3: library part "0402 (1005 Metric) 1/16 W 100R 1 Thick Film Chip Resistor"
R2 R5 R6 R7 R8 R14 R17 R18 R19 R20 R21: library part "0402 (1005 Metric) 1/16 W 4K7 1 Thick Film Chip Resistor"
R4: library part "0402 (1005 Metric) 1/16 W 1K 1 Thick Film Chip Resistor"
R9 R10 R11 R12 R13 R24 R26 R27 R29: library part "0402 (1005 Metric) 1/16 W 33R 1 Thick Film Chip Resistor"
R22: library part "0402 (1005 Metric) 1/16 W 330R 1 Thick Film Chip Resistor"
U1: library part CMP-0067-00454-1, "Spartan-6 LX 1.2V FPGA, 102 User I/Os, 144-Pin TQFP (0.5mm Pitch), Speed Grade 2, Commercial Grade, Pb-Free"
U2: "16-Mbit 3.0V Serial Flash Memory with Uniform 4 kB Sectors"
U3: library part CMP-0267-00001-1, "Low-Voltage 4-Bit 1-Of-2 FET Multiplexer/Demultiplexer, 16-pin SOP (DBQ16)"
U4: library part CMP-0062-01489-2, "1.5A Low Dropout Positive Regulators, 8-pin LLP, Pb-Free"
U5: library part CMP-0513-00111-1, "2 M High Speed Asynchronous CMOS SRAM, 128 K x 16, -40 to 85 degC, 48-Pin BGA (TF-BGA-48), Pb-Free"
U6: "AP2114, 1A Low Dropout Positive Fixed 3V3 Regulator"
U7: "Fixed Low Drop Positive Voltage Regulator, 1.2V 5-Pin TSOT-23, Tape and Reel"
X2: library part "OSCILLATOR 20.0000MHZ SMD"

## Free pads (board coordinates)
  round 3.2 hole 3.2: 1(91.44,60.96)

## Via types
v1: diameter 0.406, hole 0.254, Top to Bottom, 170 vias
v2: diameter 0.405, hole 0.254, Top to Bottom, 8 vias
v3: diameter 0.711, hole 0.406, Top to Bottom, 6 vias
v4: diameter 0.5, hole 0.254, Top to Bottom, 4 vias
v5: diameter 1.27, hole 0.711, Top to Bottom, 3 vias

## Nets (pads, with @x,y where several pads share a name; then routed paths per layer and width w, separated by ;. In a path a pad name is that pad's centre, name@x,y a point inside that pad or via, vN(x,y) a via of type N, cw(c..) or ccw(c..) an arc to the next point about the centre after c; other vN are vias at no path point)
1V2: C6.1 C7.1 C15.1 C26.1 C37.2 J100.27 J100.28 U1.19 U1.28 U1.52 U1.89 U1.128 U7.5 | length 100.2
  Top w0.254: v1(44.371,51.434) U1.128@46.003,51.434 ; U1.19@56.816,41.647 v1(56.816,42.89) ; U1.89@57.295,62.747 57.308,62.747 v1@57.308,64.371 ; v1(60.554,39.929) 60.565,39.918 C6.1@61.316,39.918 61.316,41.626 U1.28@61.305,41.637 ; v1(65.481,50.927) 65.491,50.937 U1.52@67.105,50.937
  Bottom w0.254: C7.1@64.454,50.927 v1(65.481,50.927)
  Bottom w0.508: J100.27@36.119,42.57 J100.28@38.659,42.57 42.266,42.57 ; 42.316,51.424 C15.1@43.358,51.424 ; C15.1@43.525,51.434 v1(44.371,51.434) ; v1(56.816,42.89) 56.816,39.192 ; v1(57.308,64.421) 57.308,64.815 56.921,65.202 45.212,65.202 44.069,64.059 44.069,60.554 42.266,58.75 42.266,42.57 ; v1(60.554,39.929) 60.555,39.192 ; C37.2@61.863,35.57 U7.5@63.723,35.57 ; C37.2@61.863,35.611 62.052,35.8 62.052,37.998 61.392,38.659 61.392,39.192 ; C7.1@64.454,50.927 64.454,42.686 63.779,42.012 62.027,42.012 61.392,41.377 61.392,39.192 ; 42.266,42.57 42.266,41.758 45.748,38.275 52.753,38.275 53.67,39.192 56.816,39.192 ; 56.816,39.192 60.555,39.192 ; 60.555,39.192 61.392,39.192
3V3: C1.1 C2.1 C3.2 C4.2 C5.1 C8.1 C9.1 C10.1 C11.1 C12.1 C13.1 C14.2 C16.2 C17.2 C18.2 C19.2 C20.2 C21.2 C22.1 C25.1 C27.1 C28.2 C29.2 C30.1 C31.1 C32.1 C34.1 C36.2 C101.1 J1.2 J5.9 J100.31 J100.32 R1.2 R2.2 R5.2 R6.2 R7.2 R8.2 R17.2 R18.2 R19.2 R20.2 R21.2 R22.2 U1.4 U1.18 U1.20 U1.31 U1.36 U1.42 U1.53 U1.63 U1.76 U1.86 U1.90 U1.103 U1.122 U1.125 U1.129 U1.135 U2.8 U3.16 U5.D6 U5.E1 U6.2 U6.4 U7.1 U7.3 X2.4 | length 98.6
  Top w0.127: U1.90@56.795,62.726 U1.90@56.797,62.729 ; v2(65.202,56.439) 65.204,56.437 U1.63@67.105,56.437 ; U1.63@67.105,56.453 U1.63@67.111,56.453
  Top w0.254: v1(31.648,63.602) R17.2@31.648,64.142 ; v1(33.68,63.602) R18.2@33.68,64.142 ; v1(35.712,63.594) R19.2@35.712,64.135 ; v1(37.77,63.62) R20.2@37.77,64.16 ; v2(44.755,47.955) 44.773,47.937 U1.135@46.005,47.937 ; v2(44.754,50.929) U1.129@45.997,50.929 ; v2(44.754,52.929) U1.125@45.997,52.929 ; v2(44.762,54.437) U1.122@46.005,54.437 ; C20.2@49.251,39.745 49.305,39.799 U1.4@49.305,41.637 ; C20.2@49.281,39.714 C13.1@50.419,39.714 v1(51.192,39.714) ; v2(50.292,61.519) 50.292,62.723 U1.103@50.305,62.737 ; v1(54.788,39.929) 54.799,39.918 C8.1@55.55,39.918 ; U1.18@56.305,41.637 56.305,40.342 56.642,40.005 56.973,40.005 57.303,40.335 U1.20@57.303,41.634 ; U1.90@56.794,62.726 v2(56.794,63.957) ; v2(58.803,61.102) U1.86@58.803,62.734 ; C19.2@62.805,40.16 U1.31@62.805,41.637 ; v1(63.667,65.318) C12.1@63.667,64.491 63.805,64.352 U1.76@63.805,62.737 ; 65.056,40.005 65.305,40.255 U1.36@65.305,41.637 ; U1.42@67.105,45.937 C29.2@68.917,45.937 ; U1.53@67.105,51.437 68.096,51.437 68.475,51.057 68.736,51.057 C16.2@68.936,50.857 ; C29.2@68.903,45.937 C29.2@68.917,45.923 ; R21.2@69.792,43.256 v1(70.333,43.256) ; R5.2@69.792,44.45 v1(70.333,44.45) ; R22.2@69.937,61.62 v1(70.503,61.62) ; R1.2@69.97,60.63 v1(70.536,60.63) ; v1(76.2,49.479) C1.1@76.892,49.479 76.903,49.49 U2.8@76.903,51.079 ; U3.16@77.029,57.213 77.032,57.211 C22.1@77.032,56.439
  Top w0.508: C8.1@55.55,39.918 C21.2@56.794,39.918 ; C19.2@62.687,39.999 C10.1@63.978,39.999 ; v1(63.41,39.41) 64.059,39.41 ; v1(64.708,39.41) 64.059,39.41 ; C28.2@65.507,39.999 C10.1@63.978,39.999 ; C29.2@68.917,45.937 68.917,46.884 C2.1@68.998,46.965 v1(68.998,47.724) ; C16.2@68.936,50.857 68.936,51.83 C18.2@68.998,51.892 v1(68.998,52.64) ; C22.1@77.032,56.439 v1(77.8,56.439) ; C10.1@63.978,39.999 C10.1@64.059,39.918 64.059,39.41
  Bottom w0.127: v2(65.202,56.439) 67.037,56.439 C17.2@67.107,56.509
  Bottom w0.254: v2(44.755,47.955) 45.98,47.955 C9.1@46.107,48.082 ; v2(44.754,50.929) 45.957,50.929 C11.1@46.107,51.079 ; v1(51.643,53.243) 51.643,52.602 52.532,52.602 52.617,52.517 v1(54.32,52.517) ; v1@54.325,52.547 U5.E1@54.677,52.547 ; U5.D6@58.427,51.797 v1@58.782,51.797 ; v1(58.791,51.831) 60.494,51.831 C32.1@60.579,51.746 ; v2@58.794,61.11 C3.2@58.794,62.75 ; C32.1@60.579,51.81 C25.1@61.468,51.81 v1(62.109,51.81) ; v1@64.897,57.963 64.922,57.988 R2.2@64.922,58.554 ; R6.2@65.303,43.06 65.869,43.06 v1(65.862,43.053) ; v1(78.384,51.791) 78.417,51.823 R8.2@78.867,51.823 ; R7.2@80.289,51.823 80.714,51.823 v1(80.747,51.791)
  Bottom w0.33: C5.1@56.794,63.094 v2(56.794,63.957) ; v2@58.794,61.11 v2(58.803,61.102) ; C3.2@58.794,62.75 C3.2@58.807,62.763
  Bottom w0.381: U7.3@66.223,33.67 67.325,33.67 67.564,33.909 67.564,35.331 67.325,35.57 U7.1@66.223,35.57 ; C17.2@67.107,56.509 67.183,56.432 v1@68.351,56.432 ; 67.513,35.382 C36.2@68.231,35.382
  Bottom w0.508: v2(44.754,52.929) 44.754,53.696 ; v2@44.754,54.429 44.754,53.696 ; C9.1@46.107,48.082 v1(47.295,48.082) ; C11.1@46.107,51.079 v1(47.295,51.079) ; v1@48.195,53.989 C14.2@47.498,53.989 47.168,53.989 46.842,53.664 C27.1@46.406,53.664 44.786,53.664 44.754,53.696 ; v2(50.292,61.519) C4.2@50.292,62.823 v1(50.292,63.932) ; v1(56.794,61.595) C5.1@56.794,63.094 ; C3.2@58.807,62.763 v1(58.807,63.872) ; X2.4@60.952,57.562 60.952,57.872 C101.1@62.541,59.461 v1(62.541,59.988) ; C36.2@68.25,35.439 v1(68.25,36.982)
  Bottom w0.762: v1(68.25,36.982) C34.1@69.429,36.982 69.429,40.807 U6.4@69.719,41.097
  Bottom w1.27: U6.4@69.719,41.097 U6.2@75.619,41.097
  other v1: 68.275,35.87 68.794,36.982 48.26,54.026 68.351,56.439 64.922,57.937
5V0: C33.1 J1.1 J12.2 J100.25 J100.26 U6.3 | length 69.9
  Top w0.762: J1.1@31,33.551 29.134,33.551 29.083,33.5 ; J100.26@33.579,42.57 30.074,42.57 29.083,41.58 29.083,33.5 ; J12.2@72.822,34.925 72.822,32.791 70.714,30.683 30.455,30.683 29.083,32.055 29.083,33.5
  Bottom w0.762: J12.2@72.822,34.925 72.822,36.971 C33.1@72.833,36.982 72.833,38.035 73.595,38.797 U6.3@75.619,38.797
5V0_ARD: J7.5 J12.3 | length 25.6
  Bottom w1.27: J7.5@49.53,27.94 49.53,29.845 50.394,30.709 67.513,30.709 70.282,33.477 J12.3@70.282,34.925
5V0_REG: C23.1 J12.1 U4.6 U4.7 U4.8 U4.9 | length 11.8
  Bottom w1.27: J12.1@75.362,34.925 75.362,32.944 76.962,31.344 C23.1@79.705,31.344 82.448,31.344 ; 82.462,31.358 v4(84.506,31.358)
  other v4: 84.506,29.958 84.006,30.658 85.006,30.658
#HARD_TCK: R24.2 U1.109 | length 17.2
  Top w0.17: R24.2@30.632,64.142 30.632,63.322 32.155,61.8 43.758,61.8 44.622,60.937 U1.109@46.005,60.937
#HARD_TDI: R26.2 U1.110 | length 18.6
  Top w0.17: R26.2@32.664,64.142 32.664,63.322 33.687,62.3 46.275,62.3 47.422,61.153 47.422,60.731 47.127,60.437 U1.110@46.005,60.437
  Top w0.254: R26.2@32.487,64.172 R26.2@32.614,64.045
#HARD_TDO: R27.2 U1.106 | length 16.8
  Top w0.17: R27.2@34.696,64.135 34.696,63.195 35.192,62.7 46.375,62.7 47.65,61.425 48.344,61.425 48.805,61.886 U1.106@48.805,62.737
#HARD_TMS: R29.2 U1.107 | length 14.3
  Top w0.17: R29.2@36.754,64.16 36.754,63.246 36.9,63.1 43.288,63.1 44.399,64.211 47.899,64.211 48.305,63.805 U1.107@48.305,62.737
  Top w0.254: R29.2@36.703,64.11 R29.2@36.754,64.16
#SOFT_TCK: R10.2 U1.112 | length 33
  Top w0.17: R10.2@32.69,72.332 32.69,72.695 32.36,73.025 28.88,73.025 28.296,72.441 28.296,64.304 31.6,61 42.825,61 44.388,59.437 U1.112@46.005,59.437
#SOFT_TDI: R11.2 U1.114 | length 37.7
  Top w0.17: R11.2@35.23,72.332 35.23,72.974 34.754,73.45 28.517,73.45 27.83,72.762 27.83,64.17 31.4,60.6 42.6,60.6 44.763,58.437 U1.114@46.005,58.437
#SOFT_TDO: R12.2 U1.115 | length 42.2
  Top w0.17: R12.2@37.77,72.332 37.77,73.33 37.16,73.939 28.289,73.939 27.4,73.05 27.4,63.975 31.175,60.2 42.3,60.2 44.563,57.937 U1.115@46.005,57.937
#SOFT_TMS: R9.2 U1.111 | length 28.4
  Top w0.17: R9.2@30.15,72.332 28.873,72.332 28.727,72.187 28.727,64.473 31.8,61.4 43.15,61.4 44.613,59.937 U1.111@46.005,59.937
ARD_A0: J6.1
ARD_A1: J6.2
ARD_A2: J6.3
ARD_A3: J6.4
ARD_A4: J6.5
ARD_A5: J6.6
ARD_AREF: J9.8
ARD_D0(RX): J8.1 U1.55 | length 28.9
  Top w0.178: U1.55@67.105,52.437 68.012,52.437 68.725,53.15 71.1,53.15 73.787,55.837 73.787,70.012 74.93,71.155 J8.1@74.93,76.2
ARD_D1(TX): J8.2 U1.57 | length 28
  Top w0.178: U1.57@67.105,53.437 68.338,53.437 68.476,53.575 70.95,53.575 73.406,56.031 73.406,70.044 72.39,71.06 J8.2@72.39,76.2
ARD_D3: J8.4 U1.59 | length 28.3
  Top w0.178: U1.59@67.105,54.437 70.562,54.437 72.644,56.519 72.644,69.081 67.586,74.139 67.586,75.924 J8.4@67.31,76.2
ARD_D4: J8.5 U1.61 | length 29.3
  Top w0.178: J8.5@64.77,76.2 64.77,74.473 65.278,73.965 67.085,73.965 72.263,68.787 72.263,56.763 70.937,55.437 U1.61@67.105,55.437
ARD_D5: J8.6 U1.62 | length 30.7
  Top w0.178: J8.6@62.23,76.2 62.23,74.143 62.789,73.584 66.791,73.584 71.85,68.525 71.85,56.975 70.812,55.937 U1.62@67.105,55.937
ARD_D6: J8.7 U1.64 | length 31.8
  Top w0.178: J8.7@59.69,76.2 59.69,74.041 60.579,73.152 66.598,73.152 71.4,68.35 71.4,57.201 71.145,56.947 67.116,56.947 U1.64@67.105,56.937
ARD_D7: J8.8 U1.67 | length 32.1
  Top w0.178: J8.8@57.15,76.2 57.15,73.685 58.285,72.55 66.525,72.55 71.003,68.072 71.003,60.436 70.975,60.408 70.975,59.531 70.978,59.528 70.978,58.697 70.718,58.437 U1.67@67.105,58.437
ARD_D8: J9.1 U1.74 | length 22.5
  Top w0.254: J9.1@53.086,76.2 53.086,73.381 54.317,72.15 61.53,72.15 64.805,68.875 U1.74@64.805,62.737
ARD_D11: J9.4 U1.102 | length 16.2
  Top w0.254: J9.4@45.466,76.2 45.466,73.965 46.203,73.228 47.072,73.228 50.805,69.495 U1.102@50.805,62.737
ARD_D12: J9.5 U1.104 | length 18.2
  Top w0.254: J9.5@42.926,76.2 42.926,73.558 43.834,72.65 46.975,72.65 49.805,69.82 U1.104@49.805,62.737
ARD_D13: J9.6 U1.105 | length 20.3
  Top w0.254: J9.6@40.386,76.2 40.386,73.355 41.541,72.2 46.825,72.2 49.305,69.72 U1.105@49.305,62.737
ARD_IOREF: J7.2
ARD_RESET: J7.3
CCLK: R1.1 R3.2 U1.70 U3.11 | length 13.9
  Top w0.254: U1.70@67.105,59.937 69.055,59.937 v1(69.088,59.969) ; R3.2@69.044,59.334 69.088,59.378 v1(69.088,59.969) ; R1.1@69.07,60.63 69.088,60.612 v1(69.088,59.969) ; U3.11@77.029,60.389 v1@78.27,60.389
  Bottom w0.254: v1(69.088,59.969) 75.362,59.969 75.794,60.401 v1(78.257,60.401)
CS_ARD_ALT_N: J9.2 J13.3 U1.75 | length 61.3
  Top w0.254: J9.2@50.546,76.2 50.546,73.787 52.708,71.625 61.075,71.625 64.305,68.395 U1.75@64.305,62.737
  Bottom w0.254: J9.2@50.546,76.2 50.546,73.635 54.61,69.571 81.61,69.571 82.169,69.012 J13.3@82.169,67.894
CS_ARD_N: J13.2 U1.48 U3.13 | length 29.9
  Top w0.178: v1(65.481,48.945) U1.48@67.113,48.945 ; U1.48@67.105,48.937 70.887,48.937 74.539,52.589 74.539,54.475 ; 74.549,54.475 74.549,55.194 75.159,55.804 75.159,58.471 75.806,59.118 U3.13@77.029,59.118 79.057,59.118 79.629,59.69 J13.2@79.629,67.894
CS_ARD_STD_N: J9.3 J13.1 U1.101 | length 49
  Top w0.254: J9.3@48.006,76.2 48.006,73.152 51.305,69.853 U1.101@51.305,62.737
  Bottom w0.254: J9.3@48.006,76.2 48.006,73.304 53.416,67.894 J13.1@77.089,67.894
CS_FL_N: U2.1 U3.12 | length 21.9
  Top w0.254: v1(74.651,56.972) 74.651,59.258 75.146,59.753 U3.12@77.029,59.753 v1@78.27,59.753 ; U2.1@82.253,51.079 v1(83.642,51.079)
  Bottom w0.254: v1(74.651,56.972) 74.651,51.892 75.463,51.079 v1(83.642,51.079)
  other v1: 78.257,59.766
CSO_B_FPGA: R6.1 U1.38 U3.14 | length 34.2
  Top w0.127: v1(65.735,58.445) 64.084,58.445 63.348,57.709 63.348,44.831 64.242,43.937 U1.38@67.105,43.937
  Top w0.254: U3.14@77.029,58.483 v1@78.27,58.483
  Bottom w0.127: R6.1@65.303,43.96 65.311,43.967 v1(65.989,43.967)
  Bottom w0.17: v1@65.761,58.471 v1@78.232,58.471
  Bottom w0.254: v1(65.735,58.445) v1@65.761,58.471 ; v1@78.232,58.471 v1(78.257,58.496)
DONE: R22.1 U1.71 | length 2.8
  Top w0.254: U1.71@67.128,60.459 68.232,60.459 68.428,60.655 68.428,61.417 68.631,61.62 R22.1@69.037,61.62
EXT_PWR: C24.1 D1.2 U4.2 | length 5.8
  Bottom w0.254: U4.2@86.156,31.058 86.76,31.058
  Bottom w0.762: D1.2@86.27,34.696 86.27,33.364 86.563,33.071 87.63,33.071 C24.1@89.306,31.395
EXT_PWR#: D1.1 J11.1 | length 5.7
  Bottom w1.27: D1.1@82.69,34.696 82.69,38.092 J11.1@84.344,39.746
FPGA_CLK: R13.1 U1.56 | length 2.3
  Top w0.254: v1(65.481,52.945) 67.097,52.945 U1.56@67.105,52.937
  Bottom w0.254: R13.1@64.839,52.934 65.47,52.934 v1(65.481,52.945)